# Altium PCB 平衡车36V双声LED5_20629.PcbDoc
Units mm, origin at the board's own origin, x right, y up, seen from the top; angles counter-clockwise.
Board outline 112.39 x 117.47 mm, 2 copper layers (Top Layer, Bottom Layer); 31 components, 19 nets, 68 pads, 190 vias.
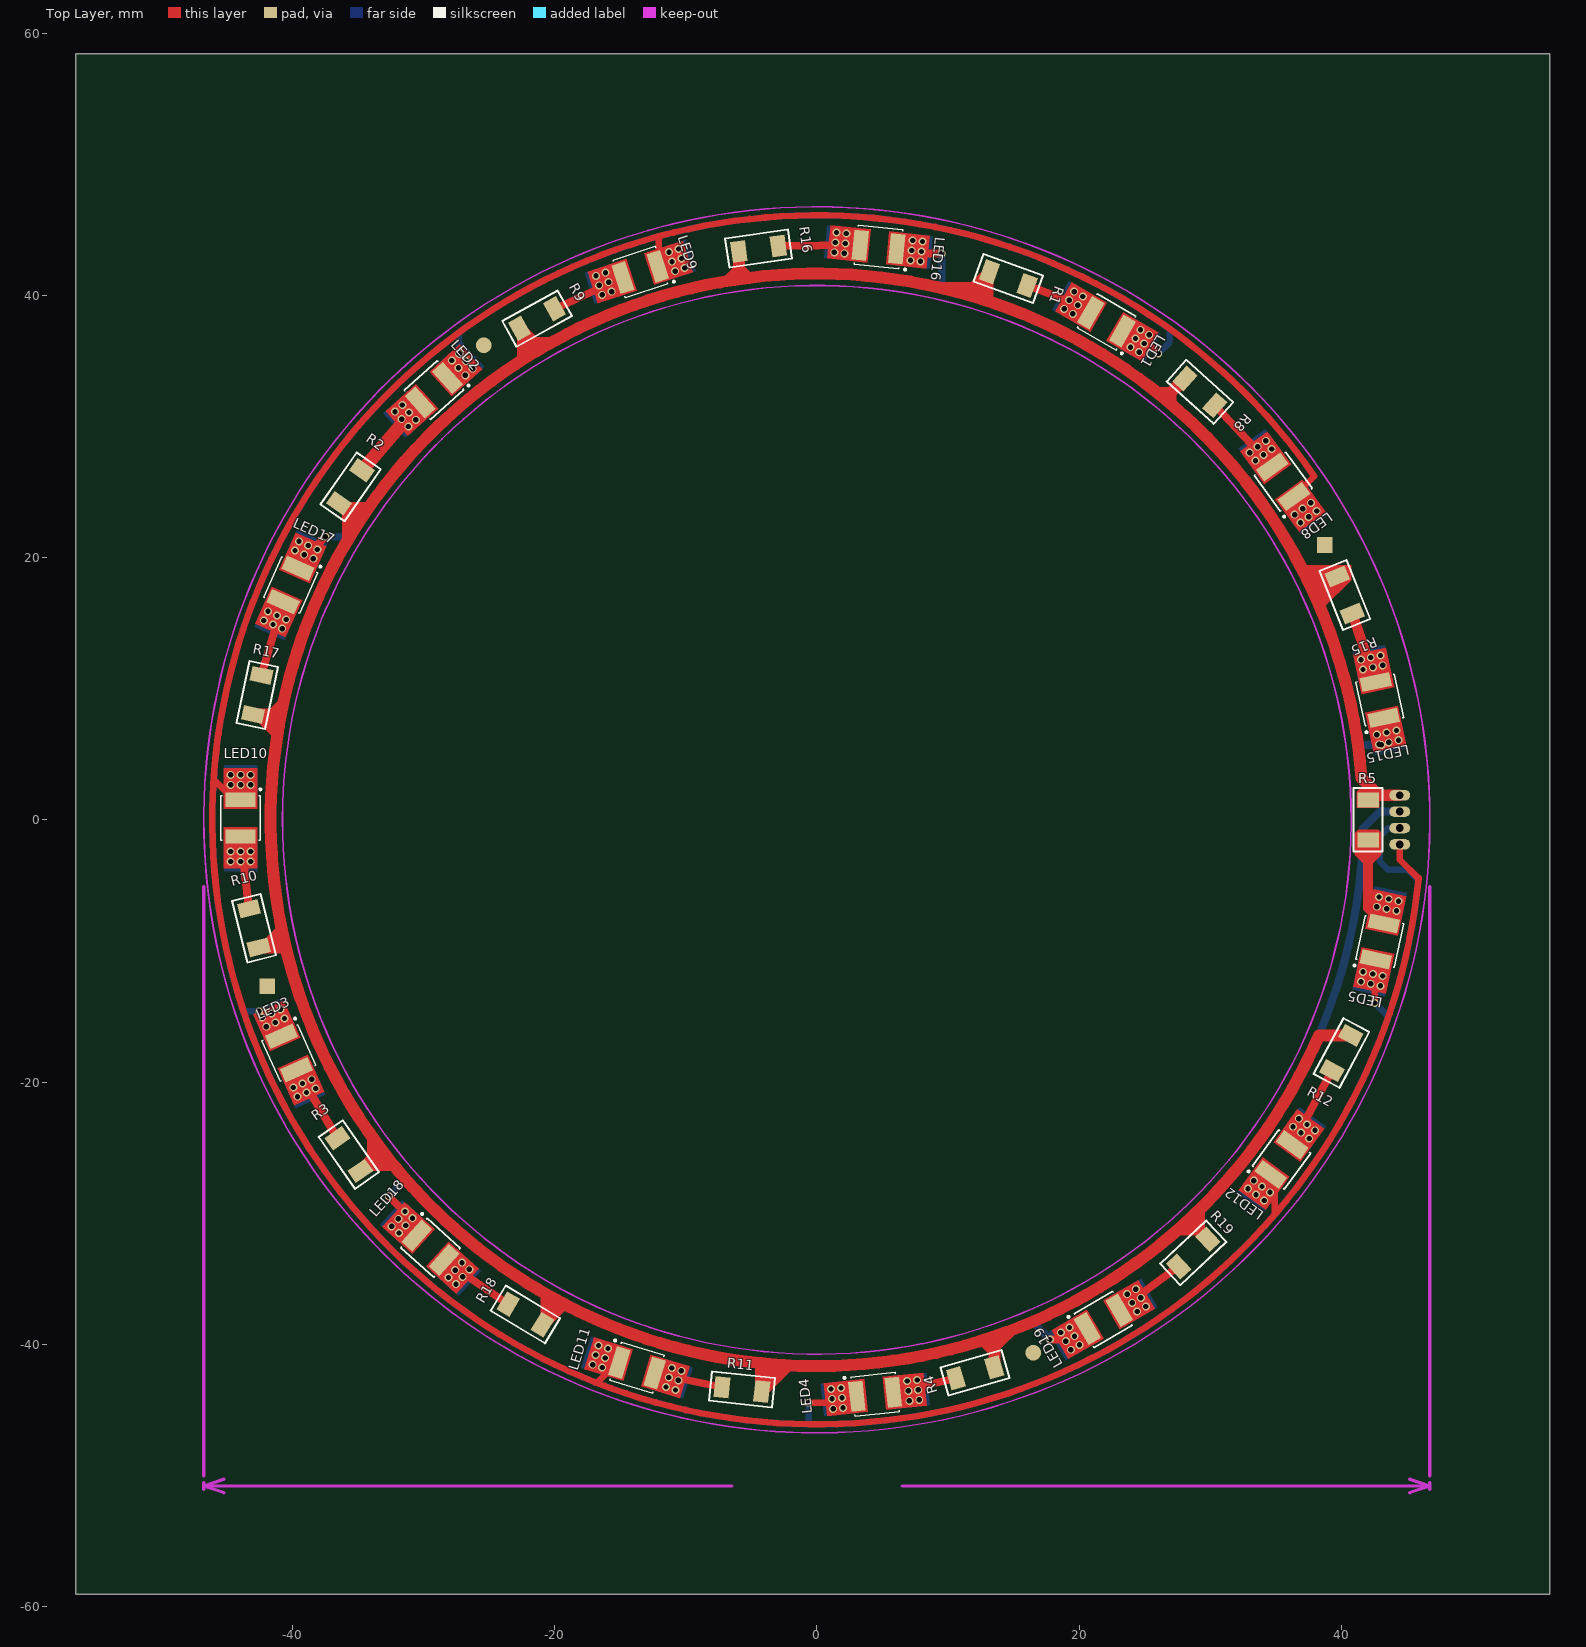
[diagram p0: Top Layer view]
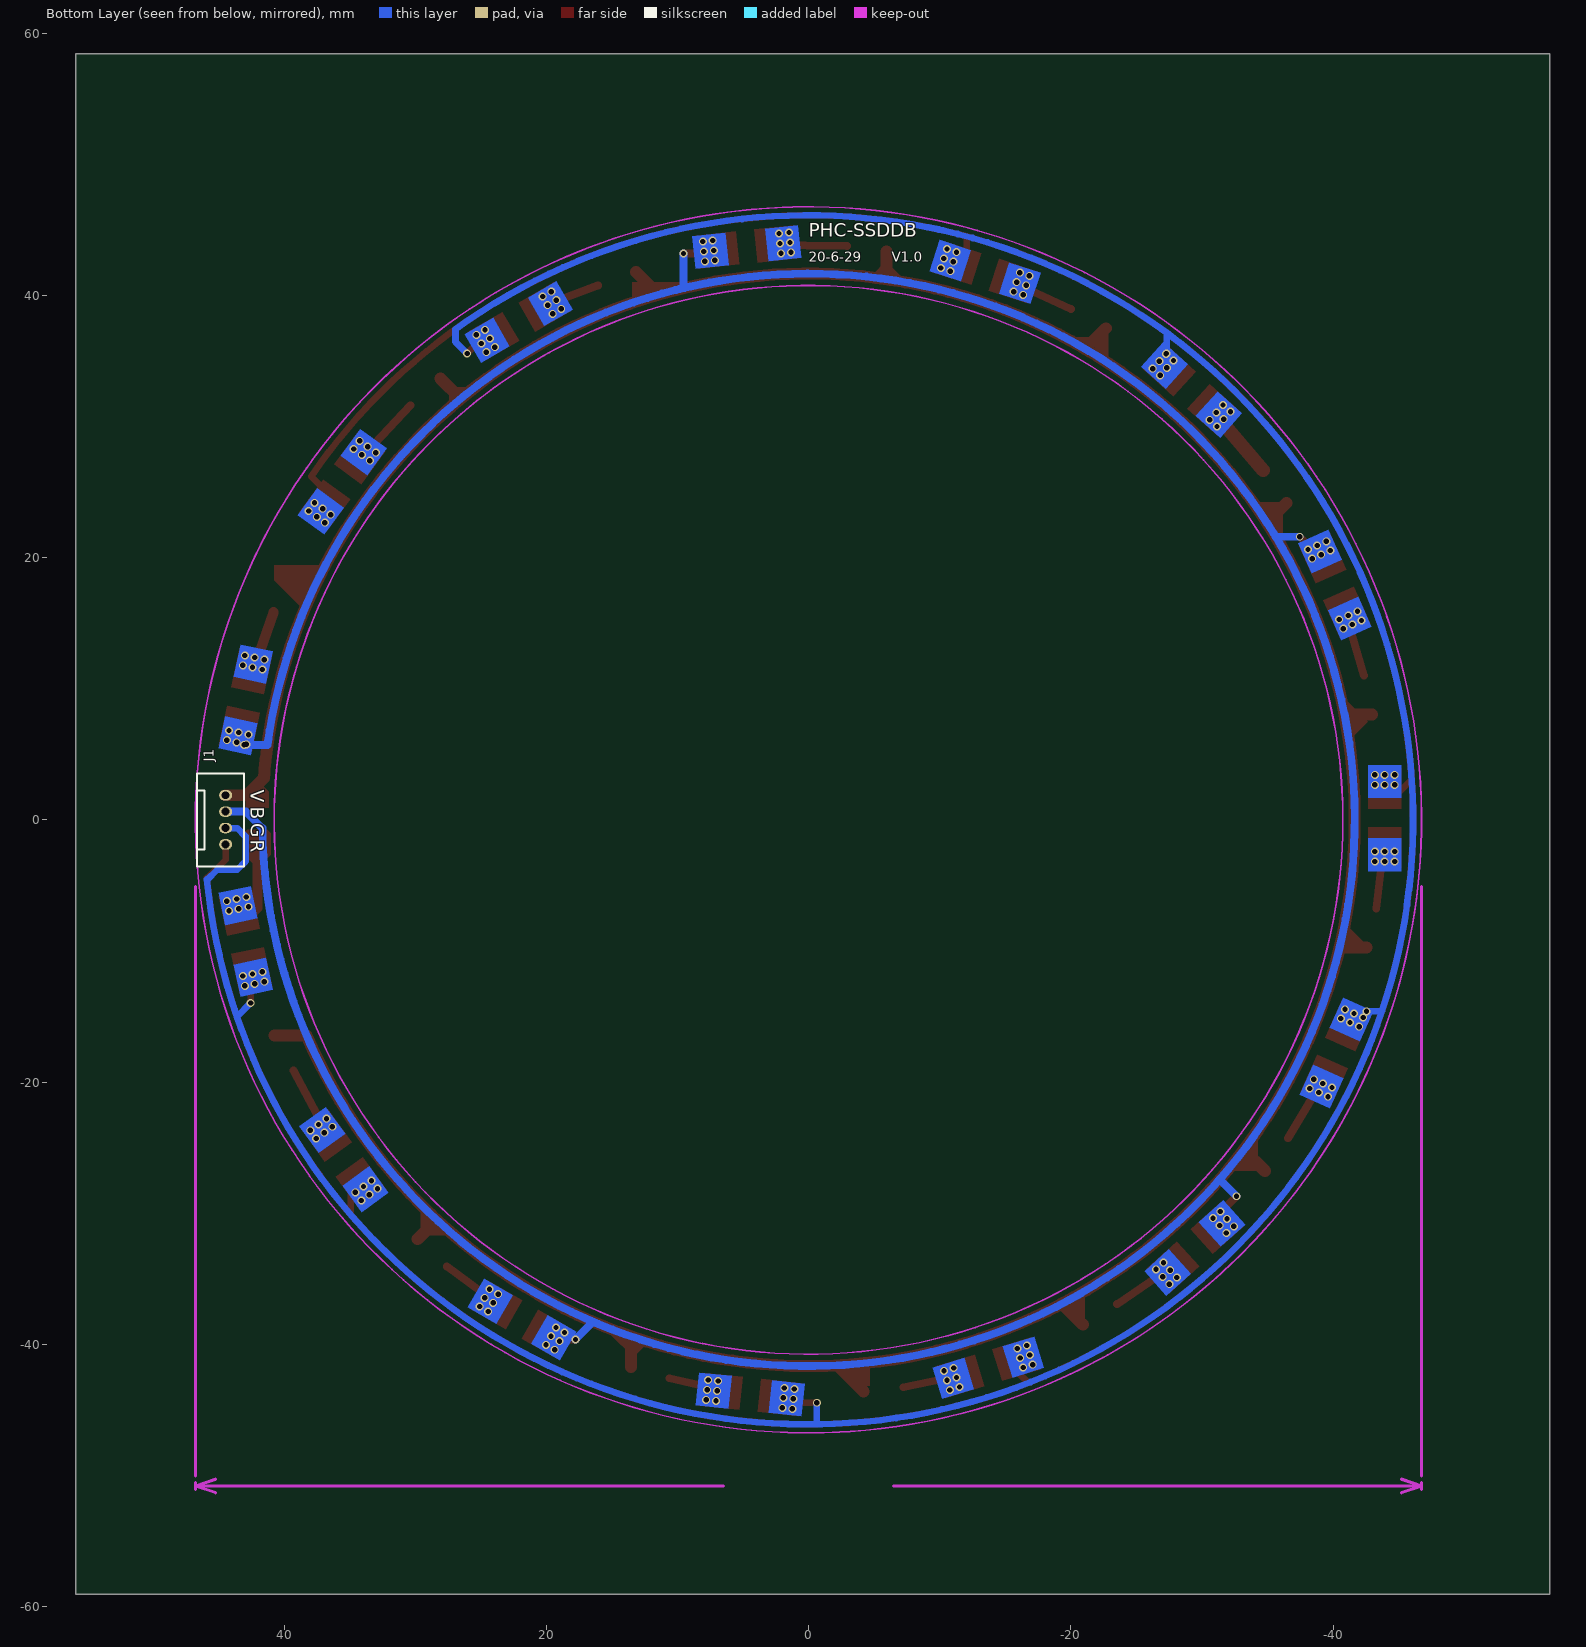
[diagram p1: Bottom Layer view, seen from below]

## Layer stack, top to bottom
Top Layer: signal copper 0.0356
Dielectric: dielectric 0.32, FR-4, Dk 4.8
Bottom Layer: signal copper 0.0356

## Board outline
-56.515,-59.055 55.88,-59.055 55.88,58.42 -56.515,58.42

## Design rules (kind name [scope] priority, off if disabled: settings)
Clearance Clearance_1 [(IsWire) Or (IsPad) Or (IsVia) Or (IsFill) Or (InPoly) Or (IsKeepOut) vs (IsWire)or(IsPad)or(IsVia)or(IsFill)or(InPoly)or(IsKeepOut)] p1 off: gap=0.254
Clearance [All] p2 off: gap=0.254
ComponentClearance [All] p1: gap=0 collisioncheckmode=3 verticalgap=0 showdistances=FALSE
HoleToHoleClearance [All] p1: gap=0 allowstackedmicrovias=TRUE
MinimumSolderMaskSliver [All] p1: minsoldermaskwidth=0
PolygonConnect PolygonConnect_1 [IsVia] p1: connectstyle=Direct reliefconductorwidth=0.254 reliefentries=4 polygonreliefangle="90 Angle" airgapwidth=0.254
PolygonConnect [All] p2: connectstyle=Relief reliefconductorwidth=0.254 reliefentries=4 polygonreliefangle="90 Angle" airgapwidth=0.254
RoutingVias [All] p1: holewidth=0.711 width=1.27 viastyle="Through Hole" minholewidth=0.203 minwidth=0.254 maxholewidth=0.711 maxwidth=1.27
SilkToSilkClearance [All] p1: silktosilkclearance=0
SilkToSolderMaskClearance SilkscreenOverComponentPads [IsPad] p1: minsilkscreentomaskgap=0 clearancetoexposedcopper=TRUE
SolderMaskExpansion [All] p1: expansion=0.102
Width [All] p1: maxlimit=2.032 minlimit=0.254 preferedwidth=0.254
23 further rules are at their usual default settings.

## Components (designator, comment, footprint, x,y, rotation, side; value= is the part's Value field where it differs from the comment)
J1 "左右灯板" 4P-1.25_1 44.45,0 r90 bottom (schematic designator P2)
LED1 "GREEN" 2835LED 22.098,37.973 r330 top
LED2 "GREEN" 2835LED -29.21,32.766 r42 top
LED3 "GREEN" 2835LED -40.259,-17.78 r114 top
LED4 "GREEN" 2835LED 4.445,-43.815 r186 top
LED5 "GREEN" 2835LED 42.926,-9.271 r258 top
LED8 "RED" 2835LED 35.56,25.781 r306 top
LED9 "RED" 2835LED -13.462,41.783 r18 top
LED10 "RED" 2835LED -43.942,0.127 r90 top
LED11 "RED" 2835LED -13.716,-41.783 r163 top
LED12 "RED" 2835LED 35.433,-25.908 r234 top
LED15 "BLUE" 2835LED 42.926,9.144 r282 top
LED16 "BLUE" 2835LED 4.699,43.688 r354 top
LED17 "BLUE" 2835LED -40.132,17.907 r66 top
LED18 "BLUE" 2835LED -29.464,-32.639 r138 top
LED19 "BLUE" 2835LED 21.844,-38.1 r210 top
R1 "1K" LC-1206_R 14.605,41.275 r160 top
R2 "1K" LC-1206_R -35.56,25.4 r235 top
R3 "1K" LC-1206_R -35.687,-25.527 r305 top
R4 "1K" LC-1206_R 12.065,-42.164 r16 top
R5 "1K" LC-1206_R 42.037,0 r90 top
R8 "1K" LC-1206_R 29.21,32.639 r138 top
R9 "1K" LC-1206_R -21.336,38.227 r209 top
R10 "1K" LC-1206_R -42.926,-8.255 r284 top
R11 "1K" LC-1206_R -5.715,-43.434 r354 top
R12 "1K" LC-1206_R 40.005,-17.78 r62 top
R15 "1K" LC-1206_R 40.259,17.145 r112 top
R16 "1K" LC-1206_R -4.445,43.561 r188 top
R17 "1K" LC-1206_R -42.672,9.525 r258 top
R18 "1K" LC-1206_R -22.225,-37.719 r329 top
R19 "1K" LC-1206_R 28.702,-33.02 r43 top

## Footprints (in the part's own frame and the unit in brackets; to place one, negate y for a bottom-side part, rotate by r counter-clockwise, add the part's x,y. Pads: shape width x height; smd on the part's side, far side on the other; paste and mask are expansions set on the pad)
4P-1.25_1 [mm]
  oval 0.8x1 / inner oval 0.8x1.6 / far side oval 0.8x1.6 hole 0.6: 1(-1.875,0) 2(-0.625,0) 3(0.625,0) 4(1.875,0)
  silkscreen extent -3.55,-1.4 3.55,2.2
2835LED [mm]
  rect 1.1x2.3 smd: a(-1.4,0) k(1.4,0)
  Top Layer region: -0.711,1.27 -0.711,-1.27 -3.81,-1.27 -3.81,1.27
  Top Layer region: 0.711,1.27 0.711,-1.27 3.81,-1.27 3.81,1.27
  Bottom Layer region: -4.064,-1.27 -1.524,-1.27 -1.524,1.27 -4.064,1.27
  Bottom Layer region: 1.524,-1.27 4.064,-1.27 4.064,1.27 1.524,1.27
  silkscreen extent -1.7,-1.58 2.28,1.5
LC-1206_R [mil]
  rect 45x64 smd: 1(-60,0) 2(60,0)
  silkscreen extent -95,-44 95,44

## Part data
J1: library part "Header 4", "Header, 4-Pin"
LED1 LED2 LED3 LED4 LED5 LED8 LED9 LED10 LED11 LED12 LED15 LED16 LED17 LED18 LED19: library part LED
R1 R2 R3 R4 R5 R8 R9 R10 R11 R12 R15 R16 R17 R18 R19: library part R_Dup1

## Free pads (board coordinates)
  rect 1.2x1.2 smd: MARK(-41.91,-12.7) MARK(38.735,20.955)
  round 1.2 smd: MARK(-25.4,36.195) MARK(16.51,-40.64)

## Via types
v1: diameter 0.61, hole 0.406, Top Layer to Bottom Layer, tented both sides, 181 vias
v2: diameter 0.6, hole 0.4, Top Layer to Bottom Layer, tented both sides, 9 vias

## Nets (pads, with @x,y where several pads share a name; then routed paths per layer and width w, separated by ;. In a path a pad name is that pad's centre, name@x,y a point inside that pad or via, vN(x,y) a via of type N, cw(c..) or ccw(c..) an arc to the next point about the centre after c; other vN are vias at no path point)
BLUE: J1.3 LED15.k LED16.k LED17.k LED18.k LED19.k | length 288.8
  Top Layer w0.6: LED17.k@-39.766,19.289 v2(-37.465,21.59) ; v2(-32.639,-28.702) LED18.k@-30.133,-31.208 ; LED16.k@6.008,43.18 v2(9.525,43.18) ; v2(17.78,-39.624) 19.991,-39.624 LED19.k@20.701,-38.914 ; v1(43.053,5.715) LED15.k@43.053,7.493
  Bottom Layer w0.6: v2(-37.465,21.59) -35.624,21.59 ; -36.277,20.474 cw(c0,0) -36.075,20.828 cw(c0,0) -35.915,21.104 ; -35.663,21.526 cw(c0,0) -35.624,21.59 ; -35.282,22.145 ccw(c0,0) -35.624,21.59 ; v2(-32.639,-28.702) -31.358,-27.421 ; -31.647,-27.087 ccw(c0,0) -31.358,-27.421 ; -31.169,-27.635 cw(c0,0) -31.358,-27.421 ; 7.548,40.967 cw(c0,0) 8.255,40.83 ; 9.452,40.57 cw(c0,0) 9.525,40.552 ; v2(9.525,43.18) 9.525,40.552 ; 10.158,40.398 ccw(c0,0) 9.525,40.552 ; 15.982,-38.468 ccw(c0,0) 16.433,-38.277 ; 16.651,-38.183 cw(c0,0) 16.433,-38.277 ; v2(17.78,-39.624) 16.433,-38.277 ; 41.192,6.201 cw(c0,0) 41.262,5.715 ; v1(43.053,5.715) 41.262,5.715 ; J1.3 42.911,0.625 41.651,-0.635 cw(c0,0) 41.262,5.715
  other v1: 19.365,-40.411 20.025,-40.03 18.984,-39.751 19.644,-39.37 18.603,-39.091 19.263,-38.71 -31.861,-31.506 -32.428,-30.996 -31.352,-30.939 -31.918,-30.43 -30.842,-30.373 -31.408,-29.863 42.867,5.756 43.613,5.914 44.358,6.073 42.709,6.501 43.454,6.66 44.199,6.818 -38.403,19.917 -39.099,20.227 -39.795,20.537 -38.093,20.614 -38.789,20.924 -39.485,21.233 7.903,42.585 7.145,42.665 7.983,43.343 7.225,43.422 8.063,44.101 7.305,44.18
GREEN: J1.2 LED1.k LED2.k LED3.k LED4.k LED5.k | length 276.8
  Top Layer w0.5: v2(-42.545,-14.605) LED3.k@-40.625,-16.525 ; LED2.k@-28.541,34.324 v2(-27.305,35.56) ; v2(-0.635,-44.45) 3.009,-44.45 LED4.k@3.217,-44.242 ; LED1.k@23.818,37.777 v2(26.035,35.56) ; v2(42.545,-13.97) LED5.k@42.545,-10.345
  Bottom Layer w0.5: -43.708,-14.605 v2(-42.545,-14.605) ; -27.574,36.946 cw(c0,0) -27.305,37.145 ; v2(-27.305,35.56) -27.305,37.145 ; -26.925,37.421 ccw(c0,0) -27.305,37.145 ; -9.926,45.02 cw(c0,0) -9.525,45.106 cw(c0,0) -9.139,45.186 ; -1.017,-46.09 ccw(c0,0) -0.635,-46.097 ; v2(-0.635,-44.45) -0.635,-46.097 ; -0.213,-46.101 cw(c0,0) -0.635,-46.097 ; v2(26.035,35.56) 26.924,36.449 26.924,37.422 ccw(c0,0) 45.876,-4.552 ; v2(42.545,-13.97) 43.588,-15.013 ; 43.52,-15.21 ccw(c0,0) 43.588,-15.013 ; 43.702,-14.678 ccw(c0,0) 43.843,-14.252 ccw(c0,0) 43.951,-13.913 ; 43.778,-14.448 cw(c0,0) 43.588,-15.013 ; 44.256,-12.912 ccw(c0,0) 44.317,-12.7 ccw(c0,0) 44.475,-12.137 ; J1.2 43.571,-0.625 42.926,-1.27 42.926,-3.175 43.561,-3.81 45.085,-3.81 45.871,-4.596
  other v1: 1.241,-44.918 1.999,-44.838 1.161,-44.16 1.919,-44.081 1.081,-43.402 1.839,-43.323 -41.988,-15.77 -41.292,-15.46 -40.596,-15.15 -42.298,-15.073 -41.602,-14.763 -40.906,-14.454 42.985,-12.659 42.239,-12.501 41.494,-12.342 43.143,-11.914 42.398,-11.755 41.653,-11.597 -26.813,33.899 -26.246,34.409 -27.322,34.466 -26.756,34.975 -27.832,35.032 -27.266,35.542 24.577,35.662 23.917,36.043 24.958,36.322 24.298,36.703 25.339,36.982 24.679,37.363
NetLED1_a: LED1.a R1.1 | length 5.2
  Top Layer w0.6: R1.1 LED1.a@20.886,38.927
  other v1: 19.517,38.583 18.857,38.964 19.898,39.243 19.238,39.624 20.279,39.903 19.619,40.284
NetLED2_a: LED2.a R2.1 | length 6.8
  Top Layer w1.016: R2.1 LED2.a
  other v1: -31.154,29.99 -30.588,30.5 -31.664,30.557 -31.098,31.066 -32.174,31.123 -31.607,31.633
NetLED3_a: LED3.a R3.1 | length 6.1
  Top Layer w0.6: LED3.a R3.1
  other v1: -39.612,-21.106 -38.916,-20.797 -38.22,-20.487 -39.922,-20.41 -39.226,-20.1 -38.53,-19.79
NetLED4_a: LED4.a R4.1 | length 4.9
  Top Layer w0.6: LED4.a R4.1
  other v1: 7.051,-44.307 7.809,-44.228 6.971,-43.549 7.729,-43.47 6.891,-42.792 7.649,-42.712
NetLED5_a: LED5.a R5.1 | length 6.9
  Top Layer w0.762: R5.1 42.037,-6.722 LED5.a
  other v1: 44.199,-6.945 43.454,-6.787 42.709,-6.628 44.358,-6.2 43.613,-6.041 42.867,-5.883
NetLED8_a: LED8.a R8.1 | length 6.4
  Top Layer w0.6: R8.1 LED8.a
  other v1: 33.451,27.388 34.067,27.836 33.003,28.004 34.683,28.284 33.619,28.452 34.236,28.9
NetLED9_a: LED9.a R9.1 | length 5.7
  Top Layer w0.6: R9.1 LED9.a
  other v1: -16.367,40.038 -15.642,40.273 -16.602,40.763 -15.878,40.998 -16.838,41.487 -16.113,41.723
NetLED10_a: LED10.a R10.1 | length 5.5
  Top Layer w0.6: LED10.a R10.1
  other v1: -44.704,-3.175 -43.942,-3.175 -43.18,-3.175 -44.704,-2.413 -43.942,-2.413 -43.18,-2.413
NetLED11_a: LED11.a R11.1 | length 5.3
  Top Layer w0.6: LED11.a R11.1
  other v1: -10.781,-43.477 -11.51,-43.254 -10.558,-42.748 -11.287,-42.526 -10.335,-42.02 -11.064,-41.797
NetLED12_a: LED12.a R12.1 | length 6.4
  Top Layer w0.6: LED12.a R12.1
  other v1: 37.542,-24.301 36.926,-23.853 37.99,-23.685 36.31,-23.405 37.374,-23.237 36.757,-22.789
NetLED15_a: LED15.a R15.1 | length 5.6
  Top Layer w0.762: R15.1@40.782,15.85 LED15.a
  other v1: 41.653,11.47 42.398,11.628 43.143,11.787 41.494,12.215 42.239,12.374 42.985,12.532
NetLED16_a: LED16.a R16.1 | length 6.2
  Top Layer w0.6: R16.1 LED16.a
  other v1: 2.093,43.196 1.335,43.275 2.173,43.954 1.415,44.033 2.253,44.711 1.495,44.791
NetLED17_a: LED17.a R17.1 | length 5.9
  Top Layer w0.6: R17.1 LED17.a
  other v1: -40.779,14.581 -41.475,14.89 -42.171,15.2 -40.469,15.277 -41.165,15.587 -41.861,15.897
NetLED18_a: LED18.a R18.1 | length 5.9
  Top Layer w0.6: LED18.a R18.1
  other v1: -27.52,-35.415 -28.086,-34.905 -27.01,-34.848 -27.576,-34.339 -26.5,-34.282 -27.067,-33.772
NetLED19_a: LED19.a R19.1 | length 5.6
  Top Layer w0.6: LED19.a R19.1
  other v1: 24.425,-37.49 25.085,-37.109 24.044,-36.83 24.704,-36.449 23.663,-36.17 24.323,-35.789
RED: J1.1 LED8.k LED9.k LED10.k LED11.k LED12.k | length 280.4
  Top Layer w0.5: LED10.k@-44.45,1.535 -45.998,3.083 ; -29.284,35.606 cw(c0,0) -28.795,36.002 ; -16.944,-42.874 ccw(c0,0) -16.778,-42.94 ; -16.194,-43.163 cw(c0,0) -16.778,-42.94 ; LED11.k@-14.85,-41.52 -15.358,-41.52 -16.778,-42.94 ; -12.27,44.438 cw(c0,0) -12.065,44.494 ; LED9.k@-12.065,42.602 -12.065,44.494 ; -11.492,44.646 ccw(c0,0) -12.065,44.494 ; 1.51,-46.076 ccw(c0,0) 1.959,-46.059 ; 34.493,-30.586 ccw(c0,0) 34.904,-30.117 ; LED12.k@34.904,-27.326 34.904,-30.117 ; 35.031,-29.97 35.031,-29.969 ; LED8.k 37.933,26.199 ccw(c0,0) -12.065,44.494 ; J1.1 44.45,-3.037 45.884,-4.47 ; -46.006,2.964 cw(c0,0) -45.998,3.083 ; -46.006,2.964 cw(c0,0) -45.955,3.669 ; -46.006,2.964 ccw(c0,0) -46.012,2.866 cw(c0,0) -45.998,3.083 ; -45.998,3.083 cw(c0,0) -12.065,44.494 ; -45.998,3.083 ccw(c0,0) -16.778,-42.94 ; -45.998,3.083 cw(c0,0) -45.955,3.669 ; -45.998,3.083 cw(c0,0) -45.955,3.669 ; -16.778,-42.94 ccw(c0,0) 34.904,-30.117 ; 34.904,-30.117 ccw(c0,0) 35.031,-29.969 ; 34.904,-30.117 ccw(c0,0) 35.022,-29.98 ; 35.022,-29.98 ccw(c0,0) 35.031,-29.969 ; 35.022,-29.98 ccw(c0,0) 35.031,-29.969 ; 35.022,-29.98 ccw(c0,0) 35.031,-29.969 ; 35.031,-29.969 ccw(c0,0) 45.884,-4.47 ; 35.031,-29.969 ccw(c0,0) 35.54,-29.364 ; 35.031,-29.969 ccw(c0,0) 35.54,-29.364 ; 35.031,-29.969 ccw(c0,0) 35.54,-29.364 ; 45.884,-4.47 ccw(c0,0) 45.887,-4.437 cw(c0,0) 45.884,-4.47
  other v1: -16.368,-41.769 -17.097,-41.546 -16.145,-41.04 -16.874,-40.818 -15.922,-40.312 -16.651,-40.089 34.109,-29.027 33.492,-28.579 34.556,-28.411 32.876,-28.131 33.94,-27.963 33.324,-27.515 -44.704,2.667 -43.942,2.667 -43.18,2.667 -44.704,3.429 -43.942,3.429 -43.18,3.429 36.884,22.662 37.501,23.11 36.437,23.278 38.117,23.558 37.053,23.726 37.669,24.174 -10.811,41.843 -10.086,42.079 -11.046,42.568 -10.322,42.803 -11.282,43.293 -10.557,43.528
VBAT: J1.4 R1.2 R2.2 R3.2 R4.2 R5.2 R8.2 R9.2 R10.2 R11.2 R12.2 R15.2 R16.2 R17.2 R18.2 R19.2 | length 308.7
  Top Layer w0.762: R5.2@42.037,1.397 R5.2@42.515,1.875 ; R5.2 R5.2@42.388,1.875
  Top Layer w0.914: R17.2 -40.874,8.034 ; R10.2 -40.503,-9.734 ; -41.26,5.733 cw(c0,0) -41.187,6.233 cw(c0,0) -41.153,6.452 ; -41.034,7.169 cw(c0,0) -40.971,7.524 cw(c0,0) -40.903,7.884 cw(c0,0) -40.874,8.034 ; -40.759,8.597 ccw(c0,0) -40.874,8.034 ; -40.574,-9.434 ccw(c0,0) -40.503,-9.734 ; -40.22,-10.845 cw(c0,0) -40.376,-10.246 cw(c0,0) -40.403,-10.141 cw(c0,0) -40.503,-9.734 ; R2.2 -34.949,22.667 ; -34.971,22.633 cw(c0,0) -34.949,22.667 ; R3.2 -33.199,-25.161 ; -34.571,23.239 ccw(c0,0) -34.949,22.667 ; -33.662,-24.538 ccw(c0,0) -33.275,-25.06 ccw(c0,0) -33.229,-25.121 ccw(c0,0) -33.199,-25.161 ; -32.785,-25.698 cw(c0,0) -33.199,-25.161 ; -32.332,-26.266 ccw(c0,0) -31.911,-26.775 ccw(c0,0) -31.868,-26.826 ; R9.2 -21.098,35.918 ; R18.2 -19.32,-36.905 ; -20.138,-36.465 ccw(c0,0) -19.517,-36.801 ccw(c0,0) -19.499,-36.811 ccw(c0,0) -19.32,-36.905 ; -18.853,-37.145 cw(c0,0) -19.32,-36.905 ; -6.581,41.133 cw(c0,0) -5.954,41.228 ; R16.2 -5.954,41.228 ; -5.142,41.337 ccw(c0,0) -5.834,41.245 ccw(c0,0) -5.862,41.241 ccw(c0,0) -5.954,41.228 ; R11.2 -2.204,-41.598 ; -2.84,-41.559 ccw(c0,0) -2.204,-41.598 ; -2.115,-41.602 cw(c0,0) -2.204,-41.598 ; -1.388,-41.633 ccw(c0,0) -1.138,-41.64 ccw(c0,0) -0.662,-41.651 ; 10.718,40.253 cw(c0,0) 10.976,40.184 cw(c0,0) 11.419,40.06 cw(c0,0) 11.433,40.056 ; 12.116,39.855 ccw(c0,0) 11.433,40.056 ; 12.935,-39.597 ccw(c0,0) 13.53,-39.397 ; R1.2 11.433,40.056 ; R4.2 13.53,-39.397 ; 14.309,-39.121 cw(c0,0) 14.043,-39.218 cw(c0,0) 13.624,-39.365 cw(c0,0) 13.53,-39.397 ; 25.594,32.866 cw(c0,0) 25.901,32.625 cw(c0,0) 26.164,32.414 cw(c0,0) 26.532,32.113 ; 26.99,-31.73 ccw(c0,0) 27.54,-31.254 ; 27.279,31.481 ccw(c0,0) 26.836,31.86 ccw(c0,0) 26.726,31.952 ccw(c0,0) 26.532,32.113 ; R8.2 26.532,32.113 ; 28.984,-29.919 cw(c0,0) 28.849,-30.049 cw(c0,0) 28.457,-30.421 ; 29.653,-29.257 cw(c0,0) 29.138,-29.77 ; R19.2 29.138,-31.302 ; 37.086,18.97 cw(c0,0) 37.352,18.44 ; 37.411,18.32 ccw(c0,0) 37.352,18.44 ; R15.2@39.736,18.44 37.352,18.44 ; R12.2 38.277,-16.434 cw(c0,0) 41.534,3.185 ; 41.398,4.633 cw(c0,0) 41.421,4.419 ; 41.472,3.91 cw(c0,0) 41.534,3.185 ; R5.2 42.037,2.682 ; J1.4 R5.2@42.844,1.875 ; -21.309,35.793 ccw(c0,0) -21.51,35.672 cw(c0,0) -21.098,35.918 ; -21.309,35.793 cw(c0,0) -20.885,36.042 ; -21.309,35.793 cw(c0,0) -21.098,35.918 ; -21.098,35.918 cw(c0,0) -20.885,36.042 ; -21.098,35.918 cw(c0,0) -20.885,36.042 ; 27.54,-31.254 ccw(c0,0) 28.081,-30.768 ccw(c0,0) 28.353,-30.517 ; 27.54,-31.254 29.09,-31.254 ; 28.353,-30.517 ccw(c0,0) 28.457,-30.421 ; 28.353,-30.517 ccw(c0,0) 28.614,-30.274 ccw(c0,0) 29.138,-29.77 ; 28.353,-30.517 cw(c0,0) 27.922,-30.913 ccw(c0,0) 28.353,-30.517 ; 28.353,-30.517 ccw(c0,0) 28.457,-30.421 ; 28.353,-30.517 29.09,-31.254 ; 29.09,-31.254 29.138,-31.302 ; 29.138,-31.302 29.138,-29.77 ; 41.534,3.185 42.037,2.682 ; 42.037,2.682 42.388,2.331 ; 42.388,2.331 42.388,1.875 42.515,1.875 R5.2@42.844,1.875 ; 42.388,2.331 R5.2@42.844,1.875

## Keep-outs
Keep-Out Layer:
  lines w0.127: -46.75,0 ccw(c0,0) 0,46.75 ; -40.75,0 ccw(c0,0) 0,40.75 ; -10.547,-39.361 cw(c0,0) 40.75,0 ; 0,-46.75 cw(c0,0) 46.75,0 ; -12.886,44.939 cw(c0,0) -12.1,45.157 ccw(c0,0) -12.886,44.939
  lines w0.254: -46.75,-51.054 -46.75,-50.546 ; -46.75,-50.038 -46.75,-5.08 ; -45.226,-51.308 -46.75,-50.8 ; -45.226,-50.292 -46.75,-50.8 ; -6.5,-50.8 -46.75,-50.8 ; 6.5,-50.8 46.75,-50.8 ; 45.226,-51.308 46.75,-50.8 ; 45.226,-50.292 46.75,-50.8 ; 46.75,-51.054 46.75,-50.546 ; 46.75,-50.038 46.75,-5.08
  text "93.5 (mm)" at -6.246,-51.714 h1.52

## Other copper
Top Layer:
  region net VBAT: 42.926,2.159 42.037,3.048 41.148,2.159 42.037,1.27
  region net VBAT: 42.926,0.889 42.926,2.159 41.148,2.159 41.148,0.889
  region net VBAT: 27.432,31.623 27.432,32.893 26.797,32.893 26.797,31.623
  region net VBAT: 27.051,32.385 27.051,33.02 25.908,33.02 25.908,32.385
  region net VBAT: 13.462,40.005 13.462,41.021 10.541,41.021 10.541,40.005
  region net VBAT: 11.176,40.513 11.176,41.021 9.271,41.021 9.271,40.513
  region net VBAT: -4.953,41.656 -5.906,42.609 -6.668,41.847 -5.715,40.894
  region net VBAT: -5.571,41.927 -6.079,42.435 -7.239,41.275 -6.731,40.767
  region net VBAT: -21.844,34.925 -21.844,37.211 -22.86,37.211 -22.86,34.925
  region net VBAT: -20.193,36.195 -20.193,36.83 -21.971,36.83 -21.971,36.195
  region net VBAT: -35.433,21.336 -35.433,23.622 -36.195,23.622 -36.195,21.336
  region net VBAT: -34.163,23.241 -34.163,24.257 -35.941,24.257 -35.941,23.241
  region net VBAT: 40.767,18.288 40.005,19.05 37.91,16.955 38.672,16.192
  region net VBAT: 40.259,18.542 40.259,19.431 36.957,19.431 36.957,18.542
  region net VBAT: 14.351,-40.005 13.462,-39.116 12.474,-40.104 13.363,-40.993
  region net VBAT: 15.177,-39.18 14.714,-38.717 13.805,-39.625 14.268,-40.088
  region net VBAT: -3.175,-41.656 -4.699,-41.656 -4.699,-43.18 -3.175,-43.18
  region net VBAT: -19.939,-38.1 -19.939,-36.195 -21.082,-36.195 -21.082,-38.1
  region net VBAT: -33.401,-26.797 -33.401,-24.384 -34.29,-24.384 -34.29,-26.797
  region net VBAT: -32.385,-26.797 -32.385,-25.654 -34.163,-25.654 -34.163,-26.797
  region net VBAT: -40.356,-8.783 -41.079,-8.059 -42.291,-9.271 -41.567,-9.995
  region net VBAT: -40.593,8.716 -41.021,9.144 -42.338,7.827 -41.91,7.399
  region net VBAT: -40.663,7.216 -41.806,8.359 -42.672,7.493 -41.529,6.35
  region net VBAT: 40.767,18.288 40.767,19.431 40.259,19.431 40.259,18.288
  region net VBAT: 39.243,17.145 39.243,18.415 37.846,18.415 37.846,17.145
  region net VBAT: 13.462,39.624 13.462,40.64 12.7,40.64 12.7,39.624
  region net NetLED5_a: 41.021,-1.016 41.275,-0.762 42.799,-0.762 43.053,-1.016 43.053,-2.667 42.164,-3.556 41.91,-3.556 41.021,-2.667

## Silkscreen, mask and mechanical layers (free items; w line width, h text height)
Bottom Overlay:
  text "PHC-SSDDB" at 0,44.45 h1.02
  text "V1.0" at -6.35,42.545 h0.76
  text "20-6-29" at 0,42.545 h0.76
  text "V" at 42.545,2.286 h1.02 r90
  text "B" at 42.545,1.016 h1.02 r90
  text "G" at 42.545,-0.254 h1.02 r90
  text "R" at 42.545,-1.524 h1.02 r90
Mechanical 13:
  lines w0.254: -40.75,-0.254 -40.75,0.254 ; -39.226,-0.508 -40.75,0 ; -39.226,0.508 -40.75,0 ; -6.373,0 -40.75,0 ; 6.373,0 40.75,0 ; 39.226,-0.508 40.75,0 ; 39.226,0.508 40.75,0 ; 40.75,-0.254 40.75,0.254
  text "81.5 (mm)" at -6.119,-0.914 h1.52